# Altium PCB Multivibrator.PcbDoc
Units mm, origin at the board's own origin, x right, y up, seen from the top; angles counter-clockwise.
Board outline 50 x 50 mm, 2 copper layers (Top Layer, Bottom Layer); 9 components, 6 nets, 20 pads, 0 vias.
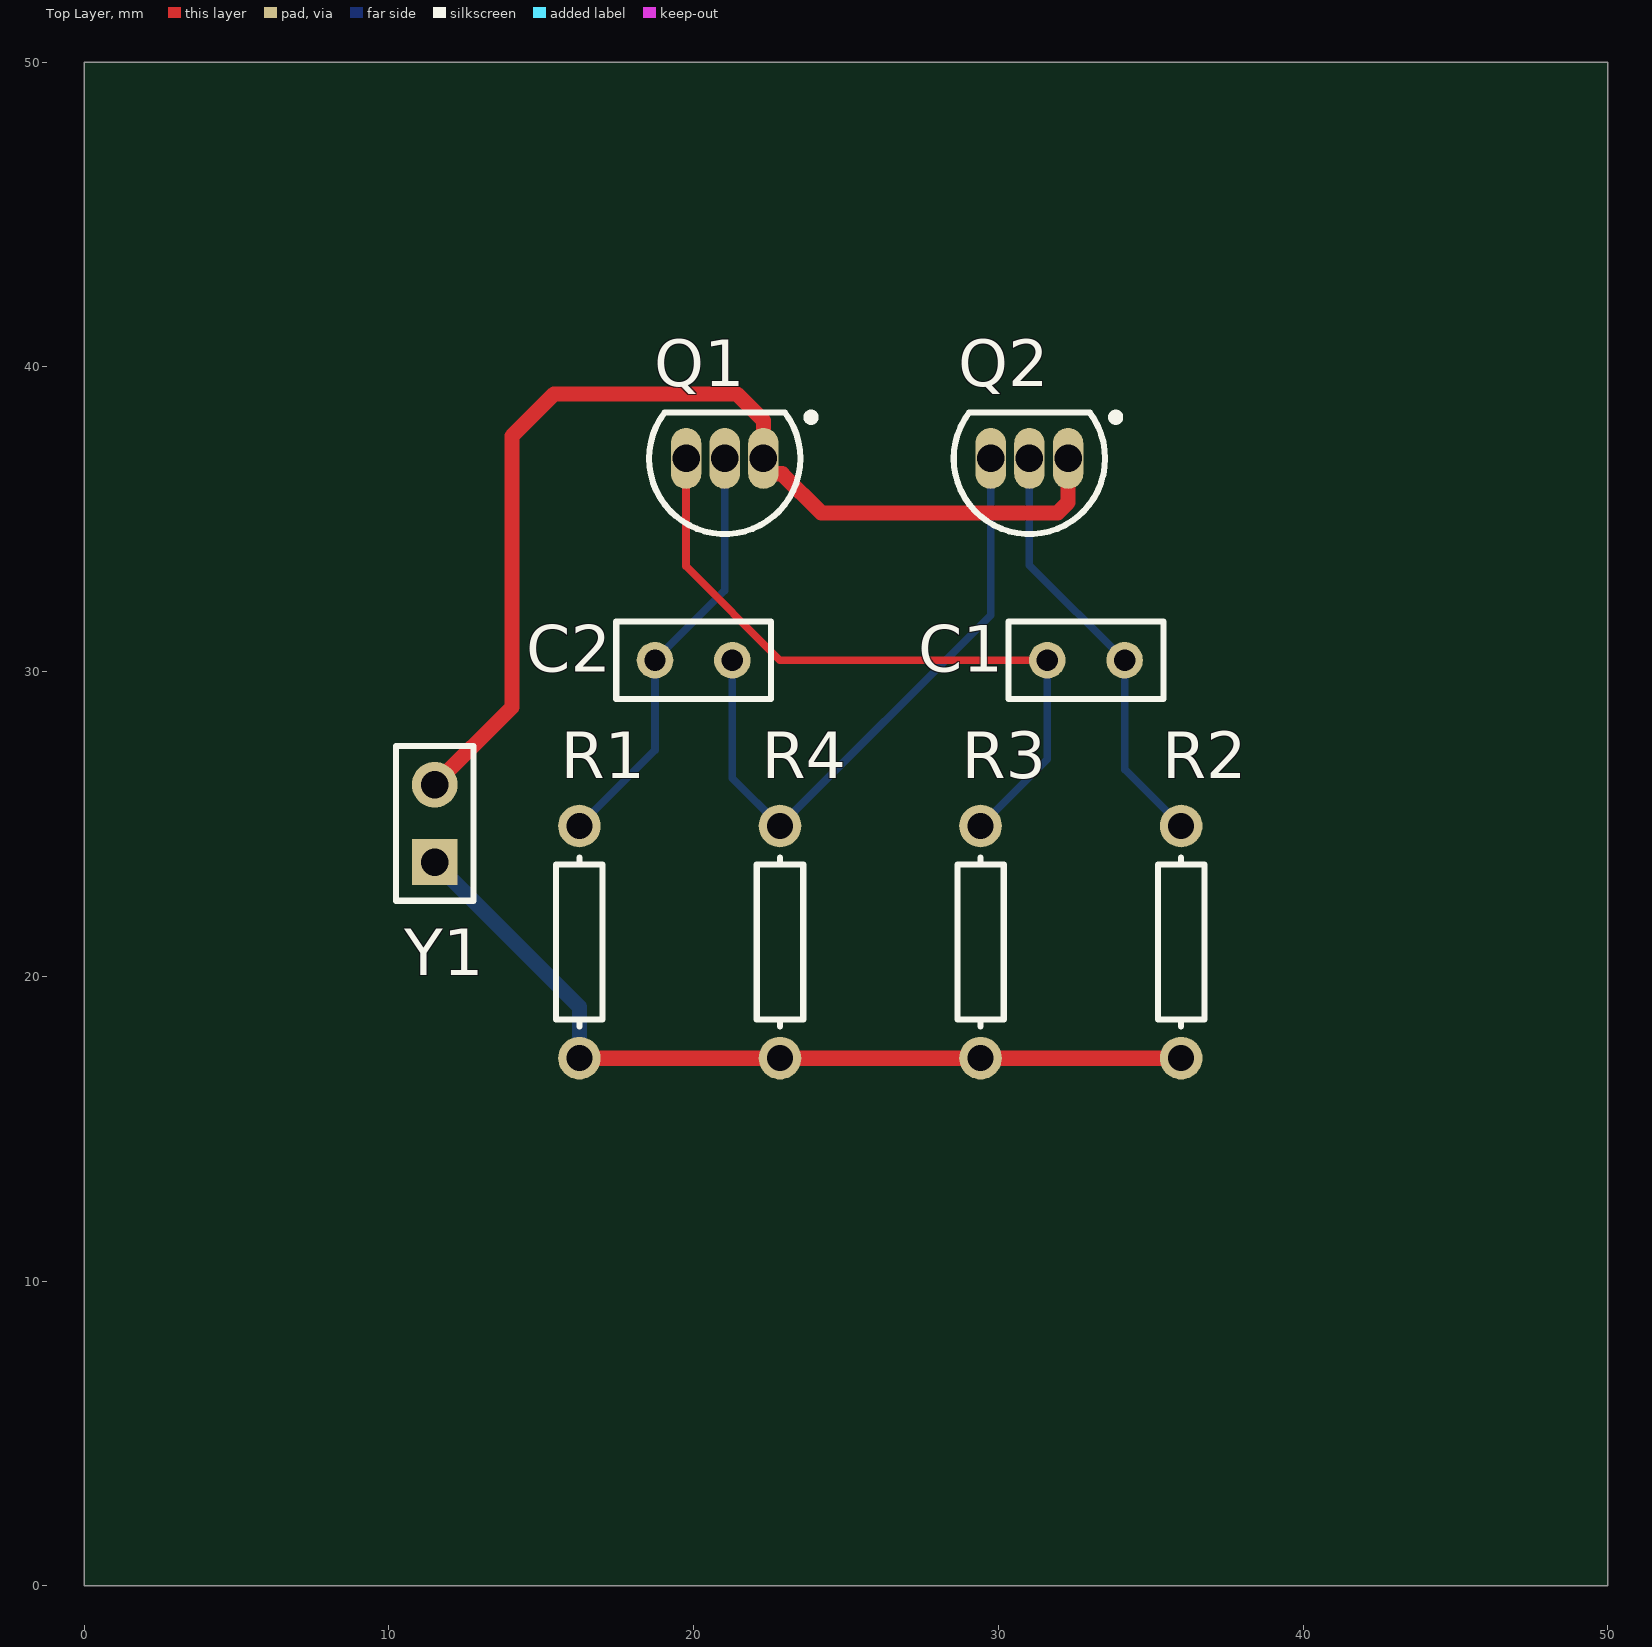
[diagram p0: Top Layer view]
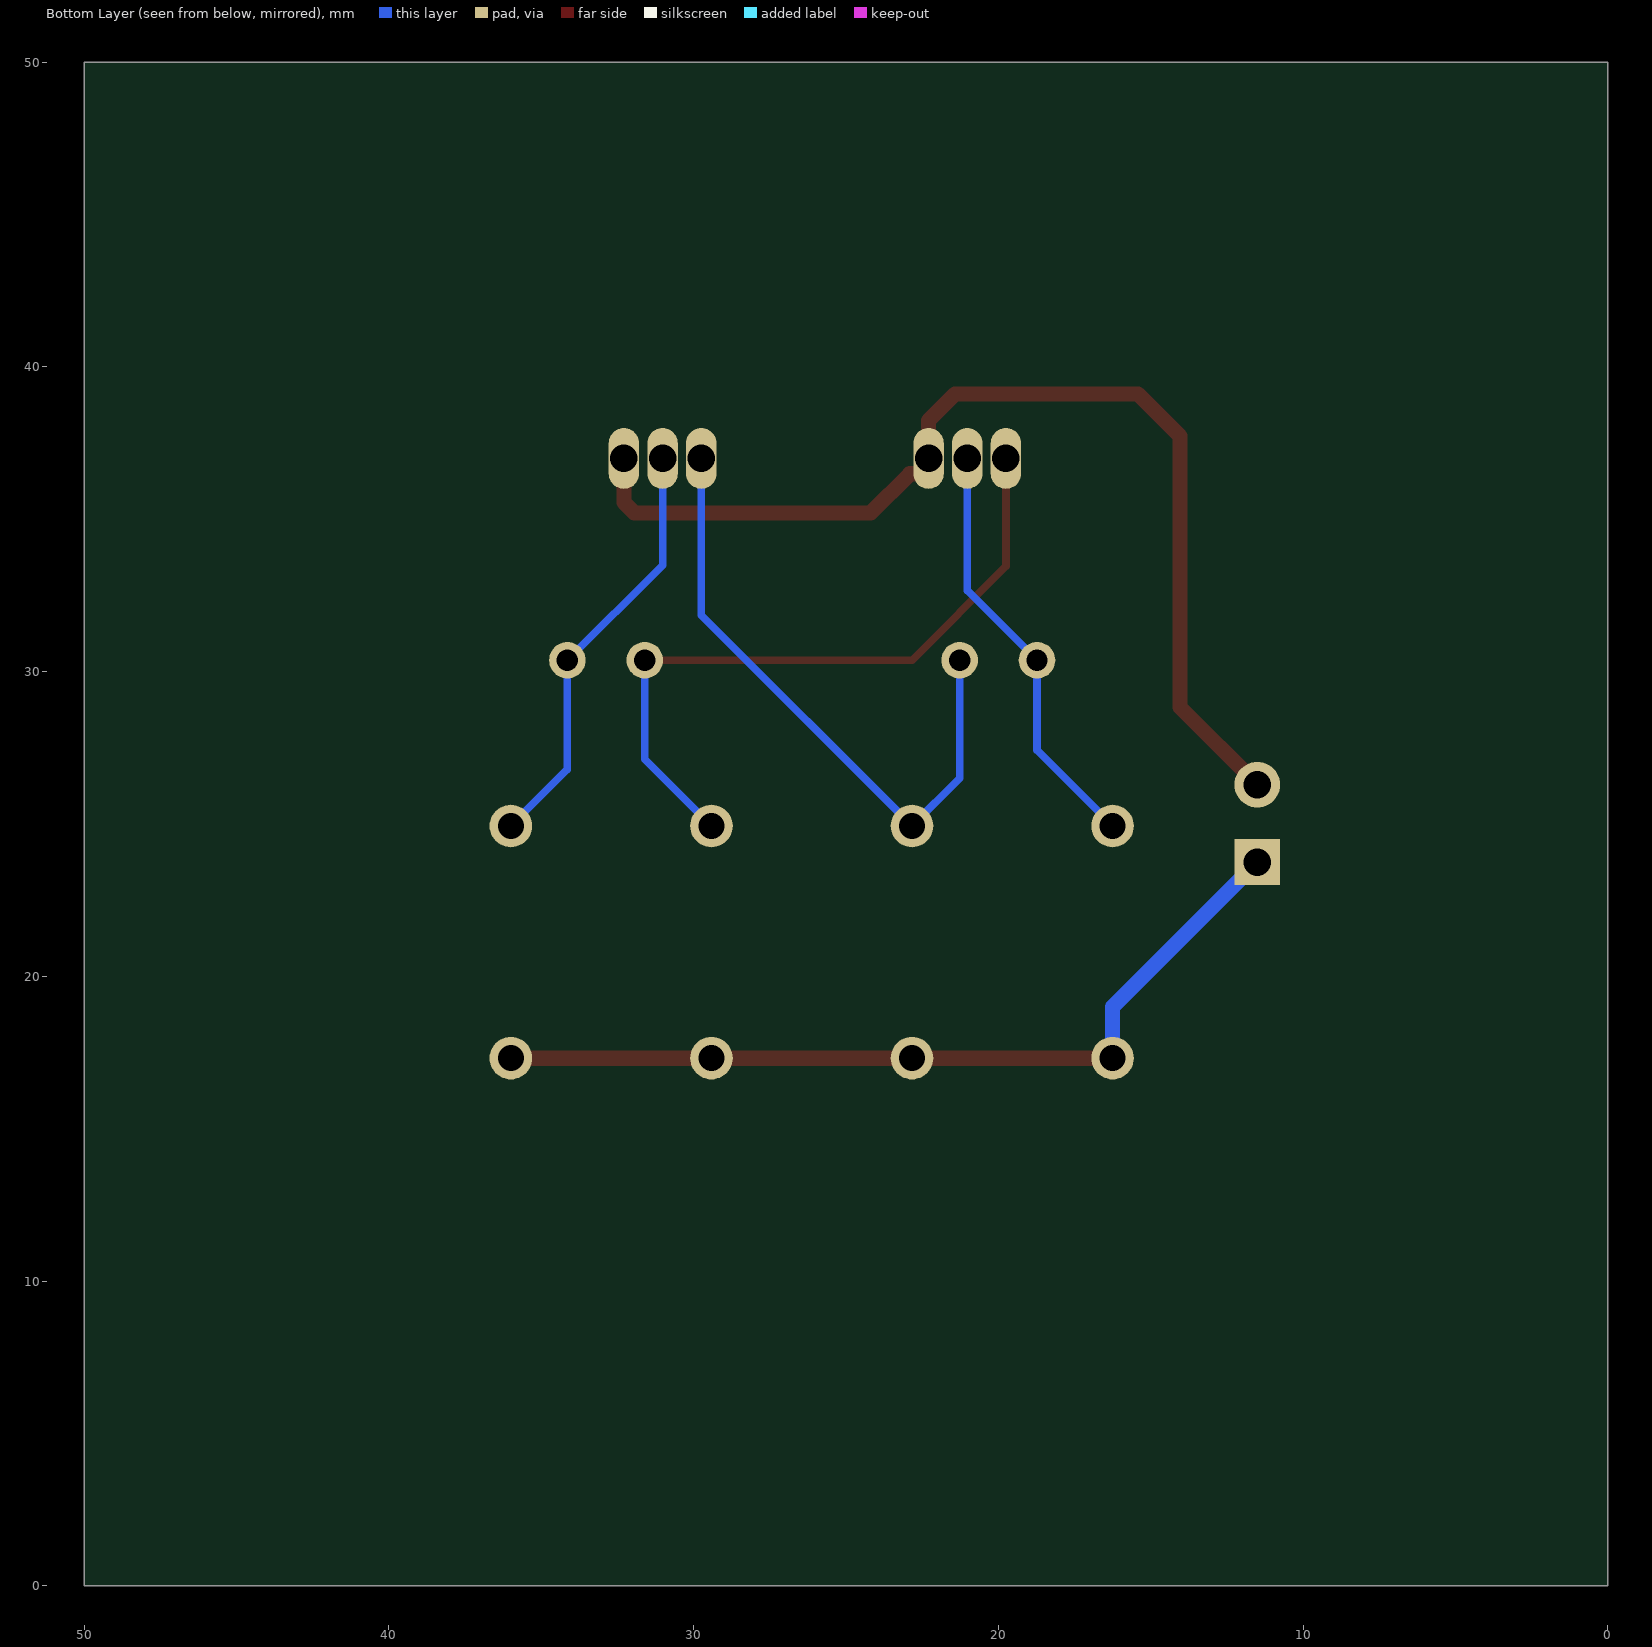
[diagram p1: Bottom Layer view, seen from below]

## Layer stack, top to bottom
Top Solder: solder mask 0.0102, Solder Resist, Dk 3.5
Top Layer: signal copper 0.0356
Dielectric1: dielectric 0.32, FR-4, Dk 4.8
Bottom Layer: signal copper 0.0356
Bottom Solder: solder mask 0.0102, Solder Resist, Dk 3.5

## Board outline
0,0 0,50 50,50 50,0

## Design rules (kind name [scope] priority, off if disabled: settings)
Clearance [All] p1: gap=0.25
FabricationTestPointUsage TestPointUsage [All] p1: valid=0 allowmultiple=FALSE
FabricationTestpoint Testpoint [All] p1: side=3 testpointundercomponent=TRUE minsize=1.016 maxsize=2.54 preferedsize=1.524 minholesize=0 maxholesize=1.016 preferedholesize=0.813 testpointgrid=0.025 allowsidetop=TRUE allowsidebottom=TRUE usegrid=TRUE gridtolerance=0
PolygonConnect [All] p1: connectstyle=Relief reliefconductorwidth=0.254 reliefentries=4 polygonreliefangle="90 Angle" airgapwidth=0.254
RoutingVias [All] p1: holewidth=0.6 width=1 viastyle="Through Hole" minholewidth=0.6 minwidth=1 maxholewidth=0.6 maxwidth=1
SilkToSolderMaskClearance SilkscreenOverComponentPads [IsPad] p1: minsilkscreentomaskgap=0.254 clearancetoexposedcopper=TRUE
SolderMaskExpansion [All] p1: expansion=0.102
Width Width_Power [(InNet('12V') OR InNet('GND'))] p1: maxlimit=0.5 minlimit=0.25 preferedwidth=0.5
Width [All] p2: maxlimit=0.25 minlimit=0.25 preferedwidth=0.25
27 further rules are at their usual default settings.

## Components (designator, comment, footprint, x,y, rotation, side; value= is the part's Value field where it differs from the comment)
C1 "20nF" RAD-0.1 32.875,30.375 r0 top
C2 "20nF" RAD-0.1 20,30.375 r0 top
Q1 "2N3904" TO-92A 21.02,37 r90 top
Q2 "2N3904" TO-92A 31.02,37 r90 top
R1 "100K" AXIAL-0.3 16.25,21.125 r270 top
R2 "100K" AXIAL-0.3 36,21.125 r270 top
R3 "1K" AXIAL-0.3 29.417,21.125 r270 top
R4 "1K" AXIAL-0.3 22.833,21.125 r270 top
Y1 "Header 2" HDR1X2 11.5,23.75 r90 top

## Footprints (in the part's own frame and the unit in brackets; to place one, negate y for a bottom-side part, rotate by r counter-clockwise, add the part's x,y. Pads: shape width x height; smd on the part's side, far side on the other; paste and mask are expansions set on the pad)
AXIAL-0.3 [mm] "Axial Device, Thru-Hole; 2 Leads; 0.3 in Pin Spacing"
  round 1.4 hole 0.85: 1(-3.81,0) 2(3.81,0)
  silkscreen extent -2.77,-0.76 2.77,0.76
HDR1X2 [mm] "Connector; Header; 2 Position"
  rect 1.5x1.5 hole 0.9: 1(0,0)
  round 1.5 hole 0.9: 2(2.54,0)
  silkscreen extent -1.27,-1.27 3.81,1.27
RAD-0.1 [mm] "Radial Cap, Thru-Hole; 2 Leads; 0.1 in Pin Spacing"
  round 1.2 hole 0.7: 1(-1.27,0) 2(1.27,0)
  silkscreen extent -2.54,-1.27 2.54,1.27
TO-92A [mm] "TO, Flat Index; 3 In-Line, Axial Leads; Body Dia. 4.5mm; Leads 0.51 x 0.48 mm (max)"
  oval 2x1 hole 0.9: 1(0,-1.27) 2(0,0) 3(0,1.27)
  silkscreen extent -2.48,-2.96 1.5,2.48, body extent -2.48,-2.5 1.5,2.5, height 6.86

## Part data
C1 C2: library part Cap, "Capacitor"
Q1 Q2: "NPN General Purpose Amplifier"
R1 R2 R3 R4: library part Res1, "Resistor"
Y1: "Header, 2-Pin"

## Nets (pads, with @x,y where several pads share a name; then routed paths per layer and width w, separated by ;. In a path a pad name is that pad's centre, name@x,y a point inside that pad or via, vN(x,y) a via of type N, cw(c..) or ccw(c..) an arc to the next point about the centre after c; other vN are vias at no path point)
12V: R1.2 R2.2 R3.2 R4.2 Y1.1 | length 28.2
  Top Layer w0.5: R1.2 R4.2 R3.2 R2.2
  Bottom Layer w0.5: Y1.1 16.25,19 R1.2
GND: Q1.1 Q2.1 Y1.2 | length 35.5
  Top Layer w0.5: Y1.2 14.041,28.831 14.041,37.738 15.413,39.11 21.426,39.11 22.29,38.246 Q1.1 22.29,36.493 22.906,36.493 24.189,35.21 31.948,35.21 32.29,35.552 Q2.1
NetC1_1: C1.1 Q1.3 R3.1 | length 23
  Top Layer w0.25: Q1.3 19.75,33.454 22.829,30.375 C1.1
  Bottom Layer w0.25: R3.1 31.605,27.123 C1.1
NetC1_2: C1.2 Q2.2 R2.1 | length 14.1
  Bottom Layer w0.25: Q2.2 31.02,33.5 C1.2 34.145,26.79 R2.1
NetC2_1: C2.1 Q1.2 R1.1 | length 14
  Bottom Layer w0.25: R1.1 18.73,27.415 C2.1 21.02,32.665 Q1.2
NetC2_2: C2.2 Q2.3 R4.1 | length 21
  Bottom Layer w0.25: C2.2 21.27,26.498 R4.1 29.75,31.852 Q2.3

## Silkscreen, mask and mechanical layers (free items; w line width, h text height)
Mechanical 16:
  drawing of 1874 lines, arcs and shapes, not listed
  text "1" at -89.286,110.509 h1.78
  text "2" at -16.642,110.509 h1.78
  text "3" at 56.51,110.509 h1.78
  text "4" at 129.408,110.509 h1.78
  text "A" at -123.627,87.497 h1.78
  text "A" at 163.393,87.497 h1.78
  text "B" at -123.627,39.44 h1.78
  text "B" at 163.393,39.44 h1.78
  text "C" at -123.627,-9.074 h1.78
  text "C" at 163.393,-9.074 h1.78
  text "ENGINEER:" at 48.458,-46.082 h1.14
  text "TITLE:" at 86.558,-46.082 h1.14
  text "PCB DESIGNER:" at 48.458,-53.575 h1.14
  text "D" at -123.627,-57.08 h1.78
  text "D" at 163.393,-57.08 h1.78
  text "DATE:" at 48.458,-61.322 h1.14
  text "PART NO.:" at 86.558,-61.322 h1.14
  text "REV:" at 139.898,-61.322 h1.14
  text "Altium Limited" at 15.438,-63.862 h1.78
  text ".PRINT_DATE" at 49.728,-64.37 h1.78
  text "12a Rodborough Rd" at 15.438,-66.402 h1.78
  text "Frenchs Forest" at 15.438,-68.942 h1.78
  text "FILE NAME:" at 48.458,-68.942 h1.14
  text "DWG NO:" at 86.558,-68.942 h1.14
  text "SCALE:" at 139.898,-68.942 h1.14
  text "NSW 2086" at 15.438,-71.482 h1.78
  text ".PCB_FILE_NAME_NO_PATH" at 49.728,-71.99 h1.78
  text "1" at -89.286,-77.451 h1.78
  text "2" at -16.642,-77.451 h1.78
  text "3" at 56.51,-77.451 h1.78
  text "4" at 129.408,-77.451 h1.78